# EAGLE board SmartBadge1 (EAGLE 9.1.3)
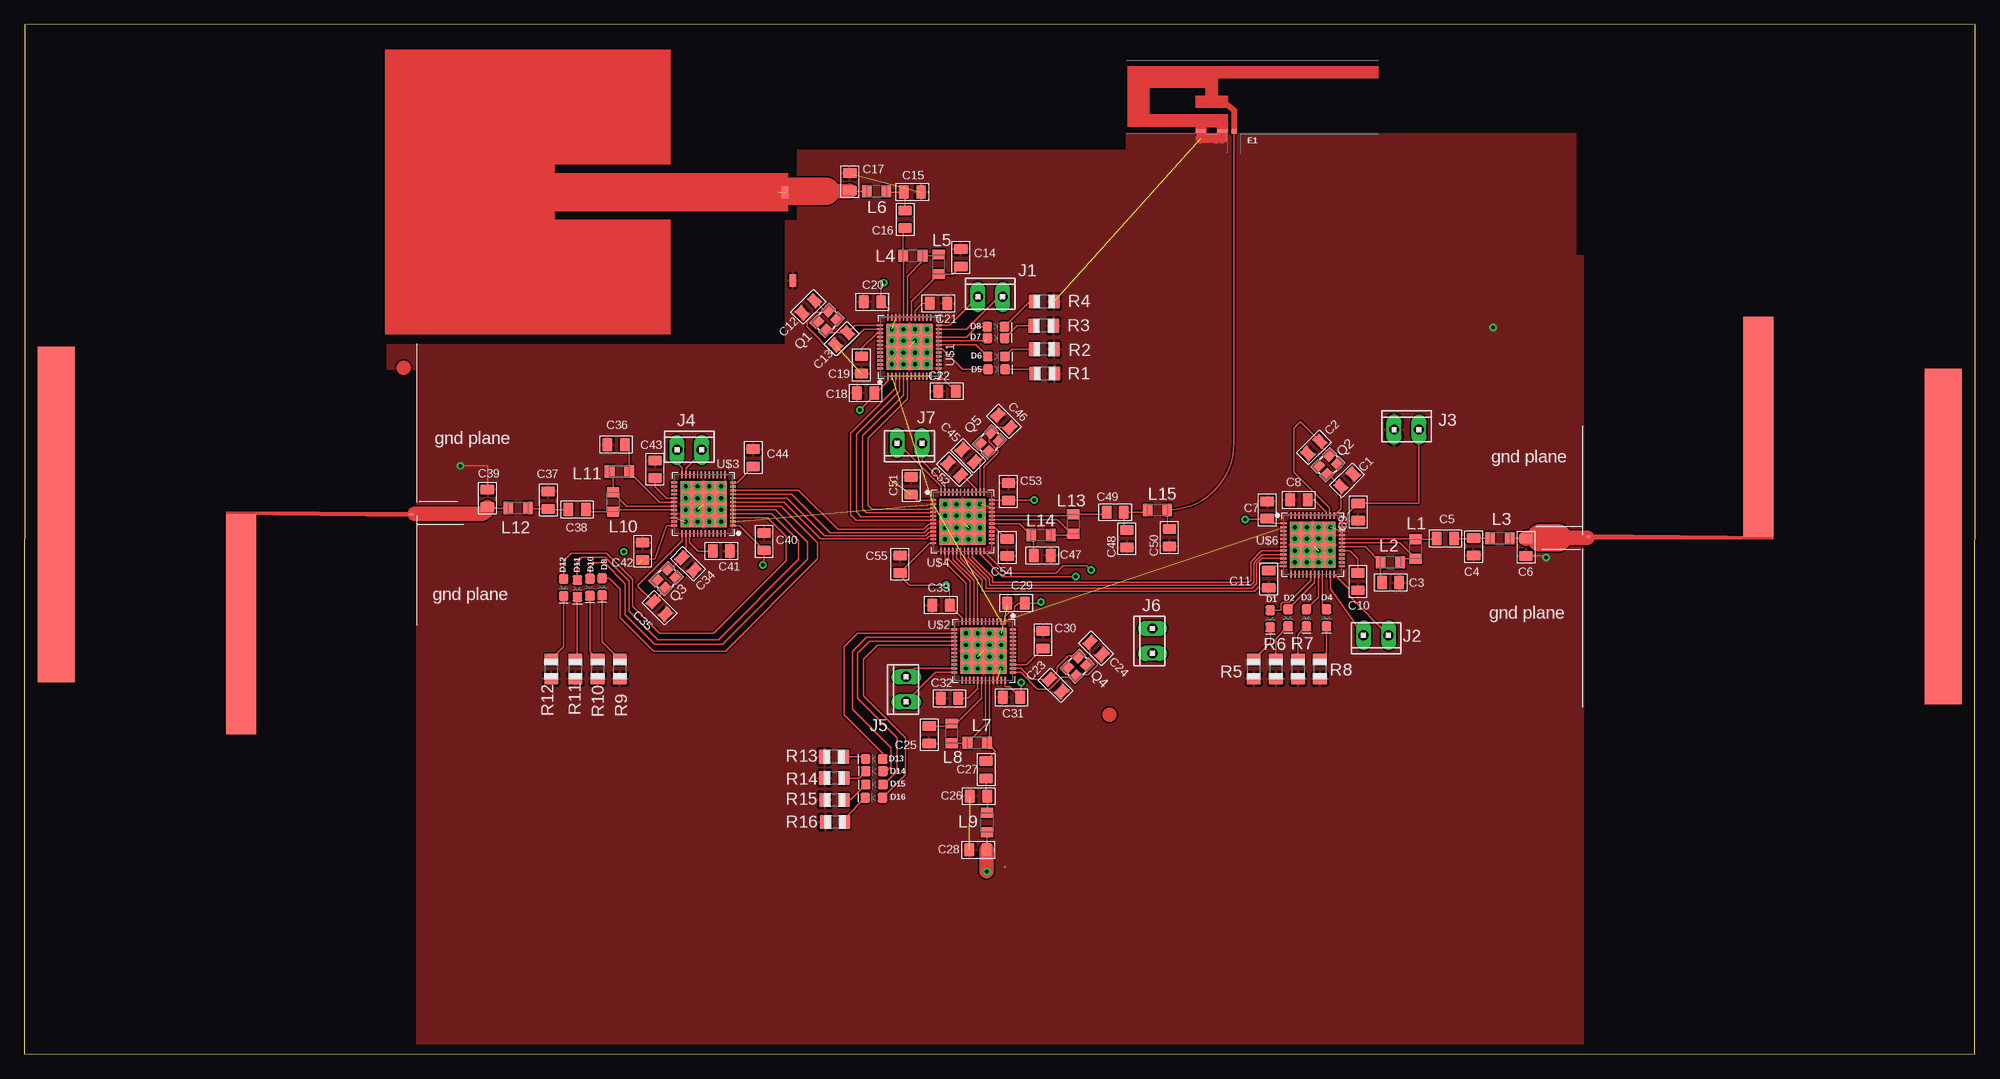
[diagram p0: board, top side]
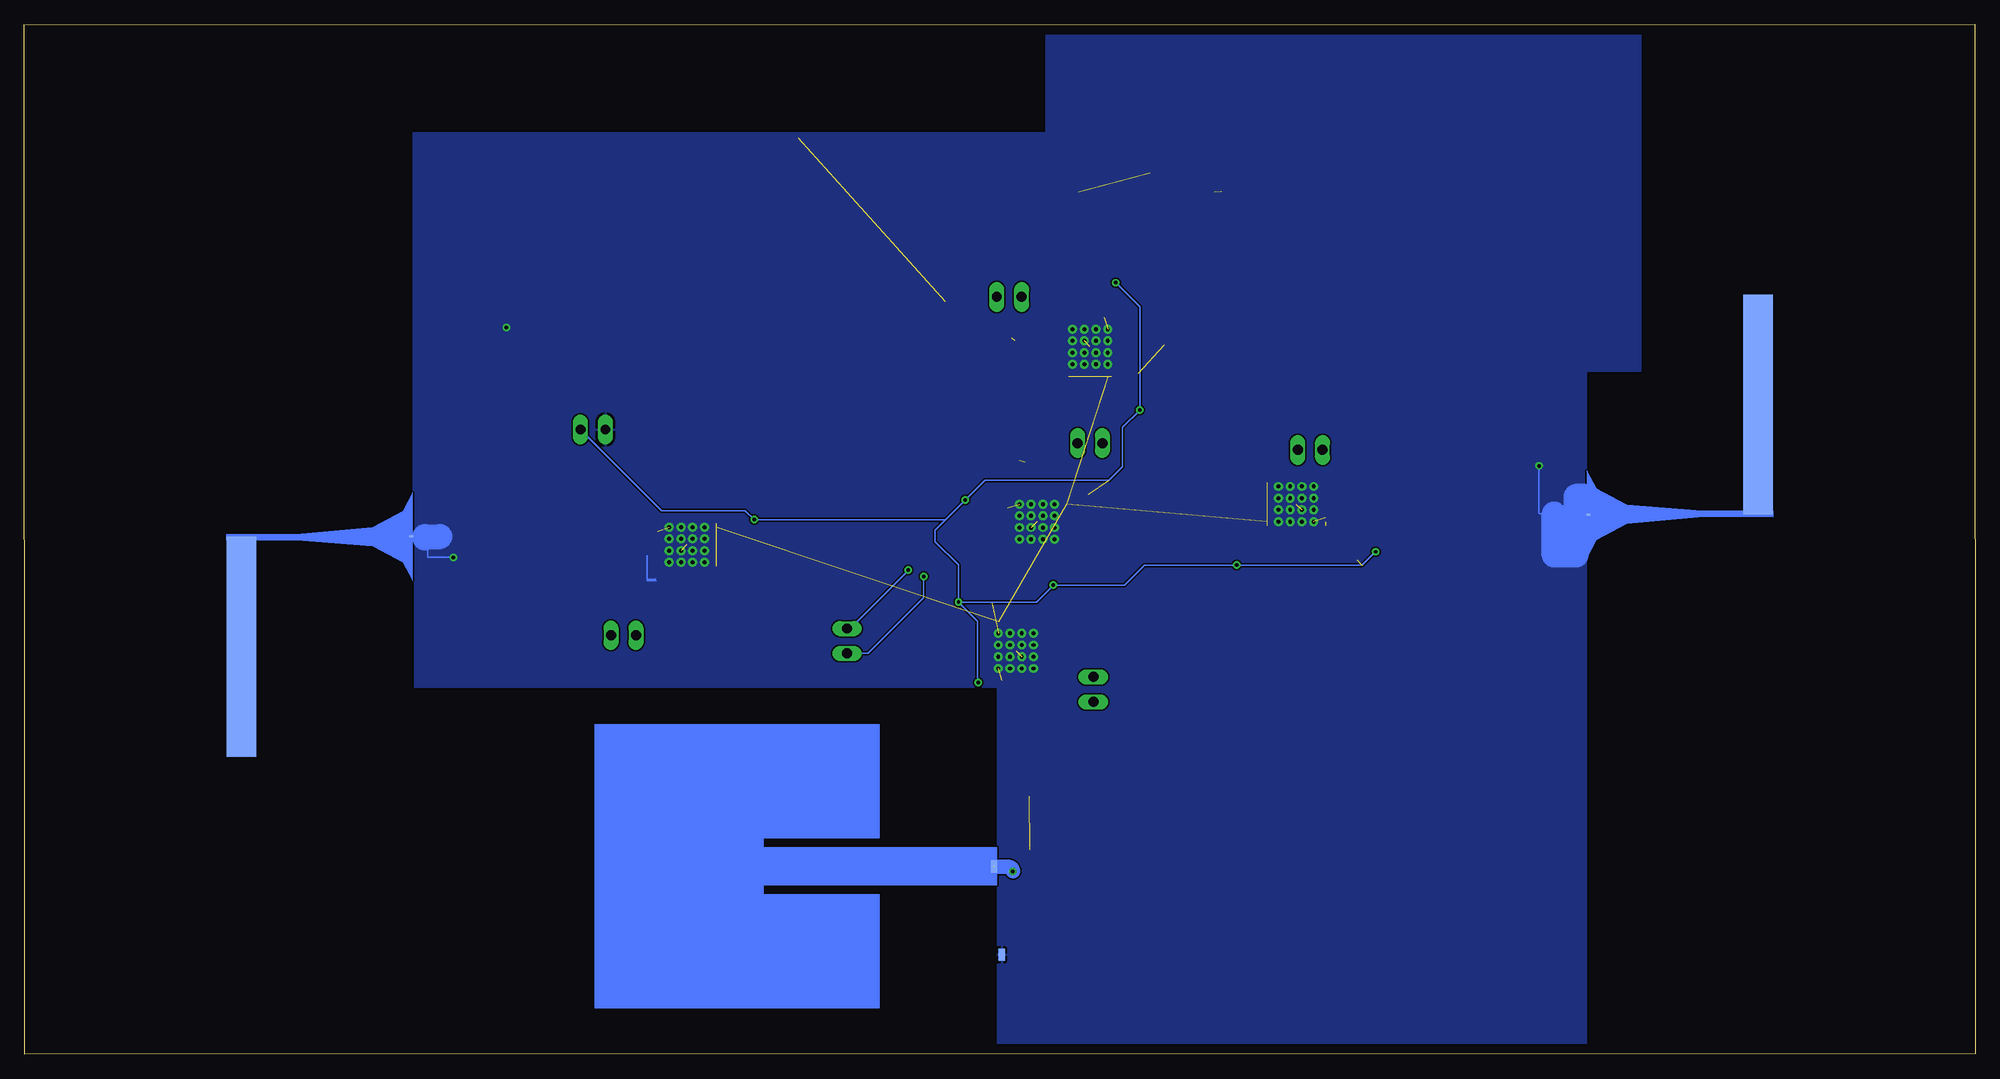
[diagram p1: board, bottom side, seen from below]

Size 199.49 x 105.27 mm. Coordinates in mm from the lower left corner, seen from the top.
Outline: 0,0.05 199.47,0 199.49,105.22 0.03,105.27 0,0.05
Copper layers (1*16): Top 0.035mm / dielectric 1.5mm / Bottom 0.035mm
Design rules "default": minimum track width 6mil, minimum drill 0.35mm, track to track 6mil, track to pad 6mil, pad to pad 6mil, via to via 6mil, smd to smd 6mil, copper to edge 40mil, drill to drill 6mil, minimum pad ring 10mil, minimum via ring 8mil, stop-mask expansion 4mil, vias tented up to drill 0mil, thermal gap 10mil
Net classes: 1 tx_line: width 2.8 mm, clearance 1.5 mm

## Footprints (pad centres in the part's own frame; a part is rotated, then mirrored left to right if it is on the bottom)
C0805 = smd 1.397 x 1.016: 1 0,0.889; 2 0,-0.889
LED-0603 = smd 1 x 1: A -0.877,0; C 0.877,0
TRACE_ANTENNA_2.4GHZ_25.7MM = smd 0.46 x 0.46: ANT 0,0.23 | smd 1 x 0.46: GND -1.18,0.23; GND2 -3.38,0.23
10X02MTA = drill 1.016 long: 1 1.27,0; 2 -1.27,0
RESC0805_L = smd 1 x 1.25: 1 -1,0; 2 1,0
2.5X2.0_KX-6 = smd 1.2 x 1: 1 -0.85,-0.65; 2 0.85,-0.65; 3 0.85,0.65; 4 -0.85,0.65
R0805 = smd 1.1 x 1.4: 1 -1,0; 2 1,0
QFN40P600X600X90-48_N = smd 0.65 x 0.2: 1 -3,2.2; 2 -3,1.8; 3 -3,1.4; 4 -3,1; 5 -3,0.6; 6 -3,0.2; 7 -3,-0.2; 8 -3,-0.6; 9 -3,-1; 10 -3,-1.4; 11 -3,-1.8; 12 -3,-2.2; 25 3,-2.2; 26 3,-1.8; 27 3,-1.4; 28 3,-1; 29 3,-0.6; 30 3,-0.2; 31 3,0.2; 32 3,0.6; 33 3,1; 34 3,1.4; 35 3,1.8; 36 3,2.2 | smd 0.2 x 0.65: 13 -2.2,-3; 14 -1.8,-3; 15 -1.4,-3; 16 -1,-3; 17 -0.6,-3; 18 -0.2,-3; 19 0.2,-3; 20 0.6,-3; 21 1,-3; 22 1.4,-3; 23 1.8,-3; 24 2.2,-3; 37 2.2,3; 38 1.8,3; 39 1.4,3; 40 1,3; 41 0.6,3; 42 0.2,3; 43 -0.2,3; 44 -0.6,3; 45 -1,3; 46 -1.4,3; 47 -1.8,3; 48 -2.2,3 | smd 4.7 x 4.7: PAD 0,0 | drill 0.4: PAD@VIA01 -1.8,1.8; PAD@VIA02 -1.8,0.6; PAD@VIA03 -1.8,-0.6; PAD@VIA04 -1.8,-1.8; PAD@VIA05 -0.6,1.8; PAD@VIA06 -0.6,0.6; PAD@VIA07 -0.6,-0.6; PAD@VIA08 -0.6,-1.8; PAD@VIA09 0.6,1.8; PAD@VIA10 0.6,0.6; PAD@VIA11 0.6,-0.6; PAD@VIA12 0.6,-1.8; PAD@VIA13 1.8,1.8; PAD@VIA14 1.8,0.6; PAD@VIA15 1.8,-0.6; PAD@VIA16 1.8,-1.8
YAGIUDA = smd 3.81 x 34.29: P$1 0,0 | smd 3.05 x 22.48: P$4 -18.92,11.24 | smd 3.05 x 22.48 bottom: P$5 -18.94,-11.25 | smd 0.406 x 0.203: P$6 -36.299,0 | smd 0.406 x 0.203 bottom: P$7 -36.311,0.012
PATCH = smd 1.27 x 0.635: P$1 -0.018,-11.677; P$2 -9.047,-12.48

## Placement (x,y rotation side)
C1  12pF  [C0805]  135.25,58.67 315 top
C2  12pF  [C0805]  131.88,62.03 135 top
C3  2.2nF  [C0805]  139.73,48.21 270 top
C4  1.0pF  [C0805]  148.21,51.87 180 top
C5  2.2pF  [C0805]  145.31,52.71 90 top
C6  1.5pF  [C0805]  153.57,51.82 180 top
C7  100nF  [C0805]  127.1,55.63 0 top
C8  100nF  [C0805]  130.33,56.67 90 top
C9  1.0nF  [C0805]  136.4,55.42 180 top
C10  47nF  [C0805]  136.37,48.31 180 top
C11  100nF  [C0805]  127.25,48.56 180 top
C12  12pF  [C0805]  80.16,76.4 135 top
C13  12pF  [C0805]  83.57,73.13 135 top
C14  2.2nF  [C0805]  95.76,81.43 0 top
C15  1.0pF  [C0805]  90.81,88.14 270 top
C16  2.2pF  [C0805]  90.07,85.34 180 top
C17  1.5pF  [C0805]  84.4,89.18 0 top
C18  100nF  [C0805]  86.03,67.59 90 top
C19  100nF  [C0805]  85.6,70.46 180 top
C20  1.0nF  [C0805]  86.72,76.91 90 top
C21  47nF  [C0805]  93.47,76.76 270 top
C22  100nF  [C0805]  94.34,67.77 90 top
C23  12pF  [C0805]  105.46,37.69 225 top
C24  12pF  [C0805]  109.6,41.48 225 top
C25  2.2nF  [C0805]  92.53,32.64 180 top
C26  1.0pF  [C0805]  97.59,26.37 90 top
C27  2.2pF  [C0805]  98.35,29.08 0 top
C28  1.5pF  [C0805]  97.54,20.88 90 top
C29  100nF  [C0805]  101.42,46.1 90 top
C30  100nF  [C0805]  104.17,42.37 0 top
C31  1.0nF  [C0805]  100.94,36.47 90 top
C32  47nF  [C0805]  94.61,36.37 90 top
C33  100nF  [C0805]  93.73,45.9 90 top
C34  12pF  [C0805]  67.87,50.11 225 top
C35  12pF  [C0805]  64.95,45.62 225 top
C36  2.2nF  [C0805]  60.5,62.31 90 top
C37  1.0pF  [C0805]  53.57,56.64 0 top
C38  2.2pF  [C0805]  56.52,55.68 270 top
C39  1.5pF  [C0805]  47.35,56.82 0 top
C40  100nF  [C0805]  75.64,52.4 0 top
C41  100nF  [C0805]  71.27,51.44 270 top
C42  1.0nF  [C0805]  63.22,51.41 0 top
C43  47nF  [C0805]  64.49,59.79 0 top
C44  100nF  [C0805]  74.52,60.99 0 top
C45  12pF  [C0805]  96.55,61.19 45 top
C46  12pF  [C0805]  100.18,64.69 45 top
C47  2.2nF  [C0805]  104.09,50.98 270 top
C48  1.0pF  [C0805]  112.75,52.68 180 top
C49  2.2pF  [C0805]  111.56,55.4 90 top
C50  1.5pF  [C0805]  117.09,52.81 180 top
C51  100nF  [C0805]  90.68,58.12 0 top
C52  100nF  [C0805]  95.1,59.79 45 top
C53  1.0nF  [C0805]  100.63,57.51 0 top
C54  47nF  [C0805]  100.51,51.79 180 top
C55  100nF  [C0805]  89.53,50.09 0 top
D1  [LED-0603]  127.41,44.5 270 top
D2  [LED-0603]  129.24,44.6 270 top
D3  [LED-0603]  131.11,44.6 270 top
D4  [LED-0603]  133.17,44.6 270 top
D5  [LED-0603]  99.42,70 0 top
D6  [LED-0603]  99.39,71.32 0 top
D7  [LED-0603]  99.36,73.2 0 top
D8  [LED-0603]  99.34,74.37 0 top
D9  [LED-0603]  59.08,47.78 270 top
D10  [LED-0603]  57.84,47.73 270 top
D11  [LED-0603]  56.54,47.6 270 top
D12  [LED-0603]  55.14,47.7 270 top
D13  [LED-0603]  86.89,30.18 180 top
D14  [LED-0603]  86.92,28.93 180 top
D15  [LED-0603]  86.92,27.56 180 top
D16  [LED-0603]  86.87,26.21 180 top
E1  ANTENNA-GROUNDEDTRACE-25.7MM  [TRACE_ANTENNA_2.4GHZ_25.7MM]  123.7,94.08 0 top
J1  [10X02MTA]  98.78,77.42 0 top
J2  [10X02MTA]  138.23,42.82 180 top
J3  [10X02MTA]  141.35,63.86 0 top
J4  [10X02MTA]  68,61.77 0 top
J5  [10X02MTA]  90.17,37.29 90 top
J6  [10X02MTA]  115.37,42.24 90 top
J7  [10X02MTA]  90.53,62.46 180 top
L1  4.7nH  [RESC0805_L]  142.29,51.64 90 top
L2  10nH  [RESC0805_L]  139.7,50.29 0 top
L3  3.3nH  [RESC0805_L]  150.9,52.73 0 top
L4  4.7nH  [RESC0805_L]  90.86,81.64 180 top
L5  10nH  [RESC0805_L]  93.5,80.75 90 top
L6  3.3nH  [RESC0805_L]  87.15,88.21 180 top
L7  4.7nH  [RESC0805_L]  97.43,31.83 0 top
L8  10nH  [RESC0805_L]  94.84,32.79 270 top
L9  3.3nH  [RESC0805_L]  98.45,23.67 270 top
L10  4.7nH  [RESC0805_L]  60.2,56.44 270 top
L11  10nH  [RESC0805_L]  60.83,59.56 180 top
L12  3.3nH  [RESC0805_L]  50.5,55.83 180 top
L13  4.7nH  [RESC0805_L]  107.26,54.2 90 top
L14  10nH  [RESC0805_L]  103.96,53.06 0 top
L15  3.3nH  [RESC0805_L]  115.87,55.63 0 top
Q1  [2.5X2.0_KX-6]  82.09,75.01 225 top
Q2  [2.5X2.0_KX-6]  133.32,60.25 225 top
Q3  [2.5X2.0_KX-6]  65.63,48.62 225 top
Q4  [2.5X2.0_KX-6]  107.67,39.65 225 top
Q5  [2.5X2.0_KX-6]  98.7,62.59 45 top
R1  R-US_R0805  [R0805]  104.34,69.57 180 top
R2  R-US_R0805  [R0805]  104.29,72.06 180 top
R3  R-US_R0805  [R0805]  104.24,74.47 180 top
R4  R-US_R0805  [R0805]  104.29,76.94 180 top
R5  R-US_R0805  [R0805]  125.73,39.37 90 top
R6  R-US_R0805  [R0805]  127.99,39.37 90 top
R7  R-US_R0805  [R0805]  130.25,39.37 90 top
R8  R-US_R0805  [R0805]  132.49,39.37 90 top
R9  R-US_R0805  [R0805]  60.88,39.37 90 top
R10  R-US_R0805  [R0805]  58.62,39.37 90 top
R11  R-US_R0805  [R0805]  56.34,39.37 90 top
R12  R-US_R0805  [R0805]  53.87,39.37 90 top
R13  R-US_R0805  [R0805]  82.8,30.4 0 top
R14  R-US_R0805  [R0805]  82.83,28.22 0 top
R15  R-US_R0805  [R0805]  82.85,25.98 0 top
R16  R-US_R0805  [R0805]  82.91,23.72 0 top
U$1  NRF51X22_QFQF  [QFN40P600X600X90-48_N]  90.5,72.31 90 top
U$2  NRF51X22_QFQF  [QFN40P600X600X90-48_N]  98.09,41.22 270 top
U$3  NRF51X22_QFQF  [QFN40P600X600X90-48_N]  69.44,56.24 180 top
U$4  NRF51X22_QFQF  [QFN40P600X600X90-48_N]  95.94,54.43 0 top
U$5  YAGI_UDA  [YAGIUDA]  196.24,52.91 0 top
U$6  NRF51X22_QFQF  [QFN40P600X600X90-48_N]  131.75,52.07 0 top
U$7  YAGI_UDA  [YAGIUDA]  3.25,55.17 180 top
U$8  2.4G_PATCH  [PATCH]  66.09,88.14 90 top
U$9  2.4G_PATCH  [PATCH]  112.01,19.2 90 bottom

## Library data of the parts
C1-C55 = Seeed-Capacitor; MPN: CC0805MKX5R5BB226
D1-D16 = SparkFun-LED; PROD_ID: DIO-00821
E1 = SparkFun-RF
J1-J7 = con-amp
L1-L15 U$1-U$4 U$6 = Nordic_nRF
Q1-Q5 = crystal-geyer_V1_0
R1-R16 = audio amplifier example
U$5 U$7 = Myown
U$8 U$9 = Patch

## Nets
0: C1.1 C2.1 C3.1 C4.1 C6.1 C7.1 C8.1 C9.1 C10.1 C11.1 C12.1 C13.1 C14.1 C15.1 C17.1 C18.1 C19.1 C20.1 C21.1 C22.1 C23.1 C24.1 C25.1 C26.1 C28.1 C29.1 C30.1 C31.1 C32.1 C33.1 C34.1 C35.1 C36.1 C37.1 C39.1 C40.1 C41.1 C42.1 C43.1 C44.1 C45.1 C46.1 C47.1 C48.1 C50.1 C51.1 C52.1 C53.1 C54.1 C55.1 E1.GND E1.GND2 J3.2 R1.1 R2.1 R3.1 R4.1 R5.1 R6.1 R7.1 R8.1 R9.1 R10.1 R11.1 R12.1 R13.1 R14.1 R15.1 R16.1 U$1.13 U$1.33 U$1.34 U$1.PAD U$1.PAD@VIA01 U$1.PAD@VIA02 U$1.PAD@VIA03 U$1.PAD@VIA04 U$1.PAD@VIA05 U$1.PAD@VIA06 U$1.PAD@VIA07 U$1.PAD@VIA08 U$1.PAD@VIA09 U$1.PAD@VIA10 U$1.PAD@VIA11 U$1.PAD@VIA12 U$1.PAD@VIA13 U$1.PAD@VIA14 U$1.PAD@VIA15 U$1.PAD@VIA16 U$2.13 U$2.33 U$2.34 U$2.PAD U$2.PAD@VIA01 U$2.PAD@VIA02 U$2.PAD@VIA03 U$2.PAD@VIA04 U$2.PAD@VIA05 U$2.PAD@VIA06 U$2.PAD@VIA07 U$2.PAD@VIA08 U$2.PAD@VIA09 U$2.PAD@VIA10 U$2.PAD@VIA11 U$2.PAD@VIA12 U$2.PAD@VIA13 U$2.PAD@VIA14 U$2.PAD@VIA15 U$2.PAD@VIA16 U$3.13 U$3.33 U$3.34 U$3.PAD U$3.PAD@VIA01 U$3.PAD@VIA02 U$3.PAD@VIA03 U$3.PAD@VIA04 U$3.PAD@VIA05 U$3.PAD@VIA06 U$3.PAD@VIA07 U$3.PAD@VIA08 U$3.PAD@VIA09 U$3.PAD@VIA10 U$3.PAD@VIA11 U$3.PAD@VIA12 U$3.PAD@VIA13 U$3.PAD@VIA14 U$3.PAD@VIA15 U$3.PAD@VIA16 U$4.13 U$4.33 U$4.34 U$4.PAD U$4.PAD@VIA01 U$4.PAD@VIA02 U$4.PAD@VIA03 U$4.PAD@VIA04 U$4.PAD@VIA05 U$4.PAD@VIA06 U$4.PAD@VIA07 U$4.PAD@VIA08 U$4.PAD@VIA09 U$4.PAD@VIA10 U$4.PAD@VIA11 U$4.PAD@VIA12 U$4.PAD@VIA13 U$4.PAD@VIA14 U$4.PAD@VIA15 U$4.PAD@VIA16 U$5.P$5 U$6.13 U$6.33 U$6.34 U$6.PAD U$6.PAD@VIA01 U$6.PAD@VIA02 U$6.PAD@VIA03 U$6.PAD@VIA04 U$6.PAD@VIA05 U$6.PAD@VIA06 U$6.PAD@VIA07 U$6.PAD@VIA08 U$6.PAD@VIA09 U$6.PAD@VIA10 U$6.PAD@VIA11 U$6.PAD@VIA12 U$6.PAD@VIA13 U$6.PAD@VIA14 U$6.PAD@VIA15 U$6.PAD@VIA16 U$7.P$5 U$8.P$2 U$9.P$2
DCC: U$1.2 U$2.2 U$3.2 U$4.2 U$6.2
N$1: C8.2 U$6.39
N$2: C1.2 Q2.3 U$6.37
N$3: C10.2 U$6.29
N$4: C2.2 Q2.1 U$6.38
N$5: C5.1 L1.2 U$6.32
N$6: L1.1 L2.2 U$6.31
N$7: C3.2 L2.1 U$6.30
N$8: C4.2 C5.2 L3.1
N$9 [tx_line]: C6.2 L3.2 U$5.P$4
N$10: C13.2 Q1.3 U$1.37
N$11: C12.2 Q1.1 U$1.38
N$12: C19.2 U$1.39
N$13: C21.2 U$1.29
N$14: C16.1 L4.2 U$1.32
N$15: L4.1 L5.2 U$1.31
N$16: C14.2 L5.1 U$1.30
N$17: C15.2 C16.2 L6.1
N$18 [tx_line]: C17.2 L6.2 U$8.P$1
N$19: C24.2 Q4.3 U$2.37
N$20: C23.2 Q4.1 U$2.38
N$21: C30.2 U$2.39
N$22: C32.2 U$2.29
N$23: C27.1 L7.2 U$2.32
N$24: L7.1 L8.2 U$2.31
N$25: C25.2 L8.1 U$2.30
N$26: C26.2 C27.2 L9.1
N$27 [tx_line]: C28.2 L9.2 U$9.P$1
N$28: C35.2 Q3.3 U$3.37
N$29: C34.2 Q3.1 U$3.38
N$30: C41.2 U$3.39
N$31: C43.2 U$3.29
N$32: C38.1 L10.2 U$3.32
N$33: L10.1 L11.2 U$3.31
N$34: C36.2 L11.1 U$3.30
N$35: C37.2 C38.2 L12.1
N$36 [tx_line]: C39.2 L12.2 U$7.P$4
N$37: C46.2 Q5.3 U$4.37
N$38: C45.2 Q5.1 U$4.38
N$39: C52.2 U$4.39
N$40: C54.2 U$4.29
N$41: C49.1 L13.2 U$4.32
N$42: L13.1 L14.2 U$4.31
N$43: C47.2 L14.1 U$4.30
N$44: C48.2 C49.2 L15.1
N$45 [tx_line]: C50.2 E1.ANT L15.2
N$46: U$1.6 U$4.3
N$47: U$1.5 U$4.4
N$48: U$1.4 U$4.5
N$49: U$1.3 U$4.6
N$50: J6.2 U$4.23
N$51: U$4.41
N$52: U$4.42
N$53: U$4.43
N$54: U$3.7 U$4.10
N$55: U$3.8 U$4.9
N$56: U$3.9 U$4.8
N$57: U$3.10 U$4.7
N$58: U$2.8 U$4.17
N$59: U$2.9 U$4.16
N$60: U$2.10 U$4.15
N$61: U$2.11 U$4.14
N$62: D1.A U$6.18
N$63: D2.A U$6.19
N$64: D3.A U$6.20
N$65: D4.A U$6.21
N$66: D5.A U$1.18
N$67: D6.A U$1.19
N$68: D7.A U$1.20
N$69: D8.A U$1.21
N$70: D12.A U$3.3
N$71: D11.A U$3.4
N$72: D10.A U$3.5
N$73: D9.A U$3.6
N$74: D13.A U$2.14
N$75: D14.A U$2.15
N$76: D15.A U$2.16
N$77: D16.A U$2.17
N$78: D5.C R1.2
N$79: D6.C R2.2
N$80: D7.C R3.2
N$81: D8.C R4.2
N$82: D1.C R5.2
N$83: D2.C R6.2
N$84: D3.C R7.2
N$85: D4.C R8.2
N$86: D13.C R13.2
N$87: D14.C R14.2
N$88: D15.C R15.2
N$89: D16.C R16.2
N$90: D12.C R12.2
N$91: D11.C R11.2
N$92: D10.C R10.2
N$93: D9.C R9.2
N$94: U$4.21 U$6.8
N$95: U$4.20 U$6.9
N$96: J4.1 U$3.23
N$97: J4.2 U$3.24
N$98: J5.1 U$2.23
N$99: J5.2 U$2.24
N$102: J2.1 U$6.23
N$103: J2.2 U$6.24
N$104: J1.1 U$1.23
N$105: J1.2 U$1.24
N$106: J6.1 U$4.24
N$107: U$4.19 U$6.10
N$108: U$4.18 U$6.11
N$109: J7.1 U$4.48
N$110: J7.2 U$4.47
VCC: C7.2 C9.2 C11.2 C18.2 C20.2 C22.2 C29.2 C31.2 C33.2 C40.2 C42.2 C44.2 C51.2 C53.2 C55.2 J3.1 U$1.1 U$1.12 U$1.35 U$1.36 U$2.1 U$2.12 U$2.35 U$2.36 U$3.1 U$3.12 U$3.35 U$3.36 U$4.1 U$4.12 U$4.35 U$4.36 U$6.1 U$6.12 U$6.35 U$6.36

## Tracks (layer width: path | path; a pad name or v marks a point on that pad's centre or on a via)
0  (via drill 0.35)  (15 unrouted)
  Top 0.152: C6.1 155.63,50.93 v155.63,50.77 | C39.1 47.35,60.15 v44.6,60.15
  Top 1.016: E1.GND2 120.32,93.67 120.32,93.62 121.89,93.62 122.52,93.62 E1.GND
  Bottom 0.152: v155.63,50.77 158.27,50.77 158.27,52.78 158.55,52.78 158.6,52.78 | 158.6,52.78 159.06,52.78 159.5,52.78 159.5,52.04 | 176.07,48.17 177.3,48.17 U$5.P$5 177.3,52.78 161.82,52.78 160.27,52.78 158.6,52.78 | 134.95,48.59 134.95,48.56 135.79,48.56 135.79,50.98 135.79,48.41 134.9,48.41 135.81,48.41 | v44.6,60.15 44.6,55.22 43.05,55.22 | U$7.P$5 22.02,66.42 22.02,67.21 22.02,55.22 39.88,55.22
  Bottom 2.54: 158.55,52.78 158.55,52.91 157,52.91 | 39.88,55.22 39.88,57.02 40.82,57.02 40.82,51 43.05,51 43.05,55.22
  other vias: 150.22,74.3
  pour Top: 37.11,72.52 77.83,72.52 77.83,72.59 77.83,85.19 79.04,85.19 79.07,92.41 112.7,92.41 112.7,94.11 158.67,94.11 158.67,81.64 159.44,81.64 159.44,62.87 159.44,0.1 158.45,0.1 40.13,0.1 40.13,70.03 37.11,70.03
  pour Bottom: 159.74,57.35 159.74,94.21 158.14,94.21 95,94.21 95,105.13 34.16,105.13 34.16,69.8 39.75,69.8 39.75,57.76 39.75,-0.03 54,-0.03 100,-0.03 100,37.52 159.56,37.52 159.56,57.18
DCC  (4 unrouted)
N$1
  Top 0.152: U$6.39 133.08,55.14 133.08,55.47 131.88,56.67 C8.2
N$2
  Top 0.152: U$6.37 134.63,55.75 C1.2 133.48,59.19 Q2.3
N$3
  Top 0.152: U$6.29 135.55,51.47 136.37,50.65 C10.2
N$4
  Top 0.152: U$6.38 133.48,55.14 133.48,55.86 129.84,59.5 129.84,63.97 130.52,64.64 C2.2 132.5,62.27 Q2.1
N$5
  Top 0.152: U$6.32 142.26,52.67 L1.2 144.36,52.64 C5.1
N$6
  Top 0.152: L2.2 141.05,50.64 L1.1 140.66,52.27 U$6.31
N$7
  Top 0.152: U$6.30 137.12,51.87 L2.1 138.7,48.35 C3.2
N$8
  Top 0.152: C5.2 148.16,52.7 C4.2 149.88,52.76 L3.1
N$9
  Top 0.152: L3.2 153.54,52.73 C6.2 | 159.82,52.78 177.32,52.78 U$5.P$4
  Top 1.499: C6.2 arc-90 153.65,52.78 155.02,52.78 | 156.82,52.78 159.82,52.78 | 110.97,34.7
  Top 2.8: 155.02,52.78 156.82,52.78
N$10
  Top 0.152: U$1.37 84.95,74.51 C13.2 82.14,73.75 Q1.3
N$11
  Top 0.152: U$1.38 85.86,74.11 83.22,71.47 82.92,71.47 80.03,74.37 80.03,74.89 81.01,75.87 82.04,75.87 Q1.1 81.76,76.07 C12.2
N$12
  Top 0.152: C19.2 85.6,72.14 87.17,73.72 U$1.39
N$13
  Top 0.152: U$1.29 91.1,76.01 91.85,76.76 C21.2
N$14
  Top 0.152: U$1.32 89.9,81.59 L4.2 89.86,84.24 C16.1
N$15
  Top 0.152: U$1.31 90.3,79.55 91.86,81.1 L4.1 93.39,81.64 L5.2
N$16
  Top 0.152: U$1.30 90.7,76.95 L5.1 94.96,79.75 C14.2
N$17
  Top 0.152: C16.2 90.07,87.99 C15.2 88.22,88.14 L6.1
N$18  (1 unrouted)
  Top 0.152: L6.2 84.48,88.21 C17.2 arc-90 84.28,88.16 77.06,88.16
  Top 1.499: C17.2 arc-90 84.35,88.24 82.83,88.24 81.99,88.24 | 75.69,88.24 76.73,88.24 | 38.79,70.15
  Top 2.8: 76.73,88.24 81.99,88.24
N$19
  Top 0.152: U$2.37 101.9,39.02 103.63,37.29 104.84,37.29 106.05,38.5 106.63,38.5 106.72,38.59 Q4.3 107.72,38.78 108.75,38.78 109.74,39.77 109.74,39.96 108.97,40.72 C24.2
N$20
  Top 0.152: U$2.38 101.93,39.42 103.03,38.32 C23.2 105.6,39.09 105.6,39.53 106.78,40.71 Q4.1
N$21
  Top 0.152: U$2.39 101.88,39.82 101.91,39.8 102.49,39.8 C30.2
N$22
  Top 0.152: U$2.29 97.5,37.4 97.51,37.39 96.5,36.37 C32.2
N$23
  Top 0.152: U$2.32 98.69,32.09 L7.2 99.32,30.94 C27.1
N$24
  Top 0.152: U$2.31 98.3,33.69 L7.1 96.4,31.79 L8.2
N$25
  Top 0.152: U$2.30 97.89,36.4 95.28,33.79 L8.1 94.58,33.53 C25.2
N$26
  Top 0.152: C27.2 98.35,26.49 C26.2 98.48,24.7 L9.1
N$27  (via drill 0.35)  (1 unrouted)
  Top 0.152: L9.2 98.45,20.9 C28.2
  Top 1.499: C28.2 arc90 98.4,20.85 v98.4,18.67
  Bottom 1.499: v98.4,18.67 arc-90 98.86,19.13 100.31,19.13 104.27,19.13
N$28
  Top 0.152: U$3.37 67.24,52.46 62.76,47.98 62.76,47.8 C35.2 65.49,47.42 Q3.3
N$29
  Top 0.152: U$3.38 67.64,51.15 C34.2 66.17,49.68 Q3.1
N$30
  Top 0.152: U$3.39 68.04,52.28 68.89,51.43 C41.2
N$31
  Top 0.152: U$3.29 65.67,56.84 65.66,56.82 64.49,57.99 C43.2
N$32
  Top 0.152: U$3.32 60.4,55.64 L10.2 57.64,55.44 C38.1
N$33
  Top 0.152: U$3.31 61.6,56.04 L10.1 60.2,59.2 L11.2
N$34
  Top 0.152: U$3.30 64.96,56.44 L11.1 61.83,61.86 C36.2
N$35
  Top 0.152: C38.2 53.65,55.68 C37.2 51.57,55.75 L12.1
N$36
  Top 0.152: L12.2 47.45,55.83 C39.2 | 39.9,55.24 22.17,55.24 U$7.P$4
  Top 1.499: C39.2 arc-90 46.66,55.24 39.9,55.24
N$37
  Top 0.152: U$4.37 98.14,60.07 99.57,61.5 99.57,61.69 98.65,62.61 98.65,63.45 Q5.3 99.27,64.06 C46.2
N$38  (1 unrouted)
  Top 0.152: U$4.38 97.74,60.7 Q5.1
N$39
  Top 0.152: U$4.39 97.26,57.5 97.26,57.83 95.88,59.22 C52.2
N$40
  Top 0.152: U$4.29 99.27,53.83 100.46,52.63 C54.2
N$41
  Top 0.152: U$4.32 107.09,55.03 L13.2 110.47,55.2 C49.1
N$42
  Top 0.152: L13.1 107.17,53.11 | 107.17,53.11 107.12,53.06 L14.2 | U$4.31 105.64,54.63 107.17,53.11
N$43
  Top 0.152: U$4.30 101.79,54.23 L14.1 103.2,52.82 C47.2
N$44
  Top 0.152: L15.1 114.65,55.4 C49.2 112.45,53.87 C48.2
N$45
  Top 0.152: C50.2 116.88,53.91 L15.2 arc90 123.7,62.45 123.7,92.61 E1.ANT
N$46
  Top 0.152: U$1.6 90.3,67 86.28,62.98 86.28,56.1 86.66,55.72 92.4,55.72 92.44,55.76 92.86,55.76 U$4.3
N$47
  Top 0.152: U$1.5 89.9,67.36 85.74,63.2 85.74,55.74 86.12,55.36 92.86,55.36 U$4.4
N$48
  Top 0.152: U$1.4 89.5,67.78 85.08,63.36 85.08,55.44 85.56,54.96 92.86,54.96 U$4.5
N$49
  Top 0.152: U$4.6 92.86,54.56 85.03,54.56 84.47,55.12 84.47,63.46 89.1,68.09 U$1.3
N$50  (via drill 0.35)
  Top 0.152: U$4.23 97.81,51.36 97.81,51.03 100.02,48.82 107.44,48.82 | 107.44,48.82 107.52,48.82 | 107.44,48.82 107.44,48.84 v107.52,48.84
  Bottom 0.152: v107.52,48.84 107.52,46.63 113.19,40.96 113.73,40.96 113.74,40.97 J6.2
N$54
  Top 0.152: U$3.7 77.68,56.44 81.41,52.7 92.28,52.7 92.53,52.96 92.86,52.96 U$4.10
N$55
  Top 0.152: U$3.8 77.99,56.84 81.82,53.01 92.15,53.01 92.5,53.36 92.86,53.36 U$4.9
N$56
  Top 0.152: U$3.9 78.45,57.24 82.38,53.31 92.03,53.31 92.47,53.76 92.86,53.76 U$4.8
N$57
  Top 0.152: 72.52,57.56 U$3.10 79.19,57.64 83.19,53.64 91.92,53.64 92.44,54.16 92.86,54.16 U$4.7
N$58
  Top 0.152: U$2.8 97.5,48.5 95.33,50.67 95.33,51.42 U$4.17
N$59
  Top 0.152: U$2.9 97.09,48.42 94.97,50.55 94.97,51.4 U$4.16
N$60
  Top 0.152: U$2.10 96.69,48.39 94.51,50.57 94.51,51.41 U$4.15
N$61
  Top 0.152: U$2.11 96.3,48.13 94.16,50.27 94.16,51.41 U$4.14
N$62
  Top 0.152: U$6.18 131.55,48.44 129.32,46.21 128.73,46.21 128.51,45.99 128.51,45.4 128.49,45.38 D1.A
N$63
  Top 0.152: U$6.19 131.95,48.21 129.24,45.49 D2.A
N$64
  Top 0.152: U$6.20 132.35,46.71 D3.A
N$65
  Top 0.152: U$6.21 132.75,45.9 D4.A
N$66
  Top 0.152: D5.A 95.94,70 93.83,72.12 U$1.18
N$67
  Top 0.152: U$1.19 97.32,72.51 D6.A
N$68  (1 unrouted)
  Top 0.152: U$1.20 98.2,72.91
N$69
  Top 0.152: U$1.21 96.33,73.31 97.38,74.37 D8.A
N$70
  Top 0.152: U$3.3 75.97,54.84 77.88,52.93 77.88,50.44 70.46,43.03 64.95,43.03 62.2,45.77 62.2,48.54 59.54,51.21 55.91,51.21 55.14,50.44 D12.A
N$71
  Top 0.152: U$3.4 76.41,55.24 79.17,52.48 79.17,50.57 70.97,42.37 64.77,42.37 61.85,45.29 61.85,48.34 59.38,50.8 57.05,50.8 56.54,50.29 D11.A
N$72
  Top 0.152: U$3.5 76.8,55.64 80.09,52.35 80.09,50.6 71.4,41.91 64.44,41.91 61.44,44.91 61.44,48.11 59.31,50.24 58.29,50.24 57.81,49.76 57.84,49.73 D10.A 57.84,48.52
N$73
  Top 0.152: U$3.6 77.36,56.04 81.13,52.27 81.13,50.62 71.7,41.2 64.34,41.2 60.94,44.6 60.94,47.52 59.8,48.65 D9.A
N$74
  Top 0.152: U$2.14 85.21,43.02 83.84,41.66 83.84,34.67 87.77,30.75 D13.A
N$75
  Top 0.152: U$2.15 86.11,42.62 84.68,41.2 84.68,35.28 88.65,31.32 88.65,29.39 88.19,28.93 D14.A
N$76
  Top 0.152: D15.A 87.84,27.52 89.26,28.94 89.26,32.33 85.19,36.4 85.19,40.97 86.45,42.22 U$2.16
N$77
  Top 0.152: U$2.17 87.27,41.82 85.8,40.36 85.8,36.65 90.09,32.36 90.09,28.56 D16.A
N$78
  Top 0.152: D5.C 102.91,70 R1.2
N$79
  Top 0.152: D6.C 101,72.06 R2.2
N$80
  Top 0.152: R3.2 101.51,74.47 100.94,73.91 100.94,73.86 100.72,73.64 100.68,73.64 D7.C
N$81
  Top 0.152: D8.C 102.78,76.94 R4.2
N$82
  Top 0.152: R5.2 127.41,42.05 D1.C
N$83
  Top 0.152: D2.C 127.99,42.48 R6.2
N$84
  Top 0.152: D3.C 130.25,42.86 R7.2
N$85
  Top 0.152: D4.C 133.17,41.06 R8.2
N$86
  Top 0.152: 84.26,30.86 R13.2 85.79,30.4 D13.C
N$87
  Top 0.152: 84.23,27.82 R14.2 85.33,28.22 D14.C
N$88
  Top 0.152: D15.C 84.47,25.98 R15.2
N$89
  Top 0.152: D16.C 83.91,24.13 R16.2
N$90
  Top 0.152: D12.C 55.14,41.64 R12.2
N$91
  Top 0.152: D11.C 56.54,40.57 R11.2
N$92
  Top 0.152: D10.C 57.84,41.16 R10.2
N$93
  Top 0.152: R9.2 59.08,42.17 D9.C
N$94
  Top 0.152: U$4.21 96.94,50.86 96.93,50.85 99.01,48.77 99.01,48.23 125.2,48.23 125.41,48.45 125.41,50.36 126.52,51.47 U$6.8
N$95
  Top 0.152: U$4.20 96.54,50.79 96.52,50.77 98.68,48.62 98.68,47.93 125.43,47.93 125.72,48.22 125.72,50.23 126.55,51.07 U$6.9
N$96
  Top 0.152: U$3.23 67.64,59.87 69.27,61.49 J4.1
N$97
  Top 0.152: U$3.24 67.24,59.96 66.73,60.48 J4.2
N$98
  Top 0.152: U$2.23 91.04,39.42 J5.1
N$99
  Top 0.152: U$2.24 93.18,39.02 J5.2
N$102
  Top 0.152: U$6.23 133.55,47.6 J2.1
N$103
  Top 0.152: U$6.24 135.45,47.57 135.45,46.89 139.5,42.84 J2.2
N$104
  Top 0.152: J1.1 99.67,77.42 96.36,74.11 U$1.23
N$105
  Top 0.152: U$1.24 94.61,74.51 J1.2
N$106  (via drill 0.35)
  Top 0.152: U$4.24 100.4,49.17 105.48,49.17 106.22,49.91 108.64,49.91 109.07,49.48 v109.09,49.48
  Bottom 0.152: v109.09,49.48 115.06,43.51 J6.1
N$107
  Top 0.152: U$6.10 126.58,50.67 126.02,50.11 126.02,48.09 125.55,47.62 98.35,47.62 98.35,48.51 96.14,50.73 U$4.19
N$108
  Top 0.152: U$6.11 128.68,50.2 126.54,50.2 126.33,49.98 126.33,47.85 125.8,47.32 97.92,47.32 97.92,48.51 95.73,50.7 95.74,50.7 U$4.18
N$109
  Top 0.152: U$4.48 93.74,58.05 89.33,62.46 J7.1
N$110
  Top 0.152: U$4.47 94.14,58.31 91.8,60.65 J7.2
VCC  (via drill 0.35)  (6 unrouted)
  Top 0.152: C42.2 64.52,50.62 65.68,54 U$3.36 | U$3.1 73.12,54.04 C40.2 75.64,50.11 v75.51,49.99 | U$3.12 72.86,58.44 C44.2 | U$2.35 U$2.36 100.3,37.6 100.33,37.57 100.53,37.57 100.74,37.57 C31.2 101.93,36.58 v101.93,38 | U$2.1 100.3,44.74 100.72,45.17 101.06,45.17 101.27,45.38 101.27,45.72 101.65,46.1 C29.2 103.86,46.1 v103.96,46.2 | U$2.12 95.89,44.62 C33.2 94.61,47.6 v94.26,47.95 90.5,47.95 89.53,48.92 C55.2 92.57,52.23 U$4.12 | U$6.35 U$6.36 135.27,54.27 135.31,54.3 135.31,55.22 C9.2 142.62,56.31 J3.1 | U$6.1 127.57,54.27 127.14,54.7 | U$1.1 88.3,68.82 87.07,67.59 C18.2 86.92,67.34 v85.42,65.84 | C22.2 93.68,69.31 U$1.12 | U$1.35 U$1.36 88.3,76.22 C20.2 87.61,78.59 v87.88,78.87 | U$4.1 91.27,56.63 C51.2 | U$4.35 U$4.36 100.62,56.63 C53.2 100.66,56.64 v103.28,56.64 | 127.14,54.7 C7.2 | U$6.12 127.67,49.87 C11.2 | v124.84,54.66 127.1,54.66 127.14,54.7
  Bottom 0.152: J3.1 134.34,55.57 125.81,55.57 124.84,54.61 | 124.84,54.61 v124.84,54.66 | 124.84,54.61 105.31,54.61 103.33,56.59 | 103.33,56.59 v103.28,56.64 103.33,56.59 | 103.33,56.59 106.35,53.57 106.35,52.4 103.96,50.01 v103.96,46.2 | v103.96,46.2 96.01,46.2 94.27,47.94 | 94.27,47.94 v94.26,47.95 | v103.96,46.2 102.01,44.25 102.01,38.07 v101.93,38 | 94.27,47.94 87.01,47.94 84.96,49.99 v75.51,49.99 62.69,49.99 v61.32,51.36 | 103.33,56.59 101.27,58.65 88.59,58.65 87.17,60.07 87.17,64.08 v85.42,65.84 85.42,76.4 v87.88,78.87